# Altium PCB Dev_Board.PcbDoc
Units mil, origin at the board's own origin, x right, y up, seen from the top; angles counter-clockwise.
Board outline 2748.38 x 2397.24 mil, 2 copper layers (Top Layer, Bottom Layer); 80 components, 110 nets, 302 pads, 128 vias.
Unrouted connection lines stored in the file: 20.
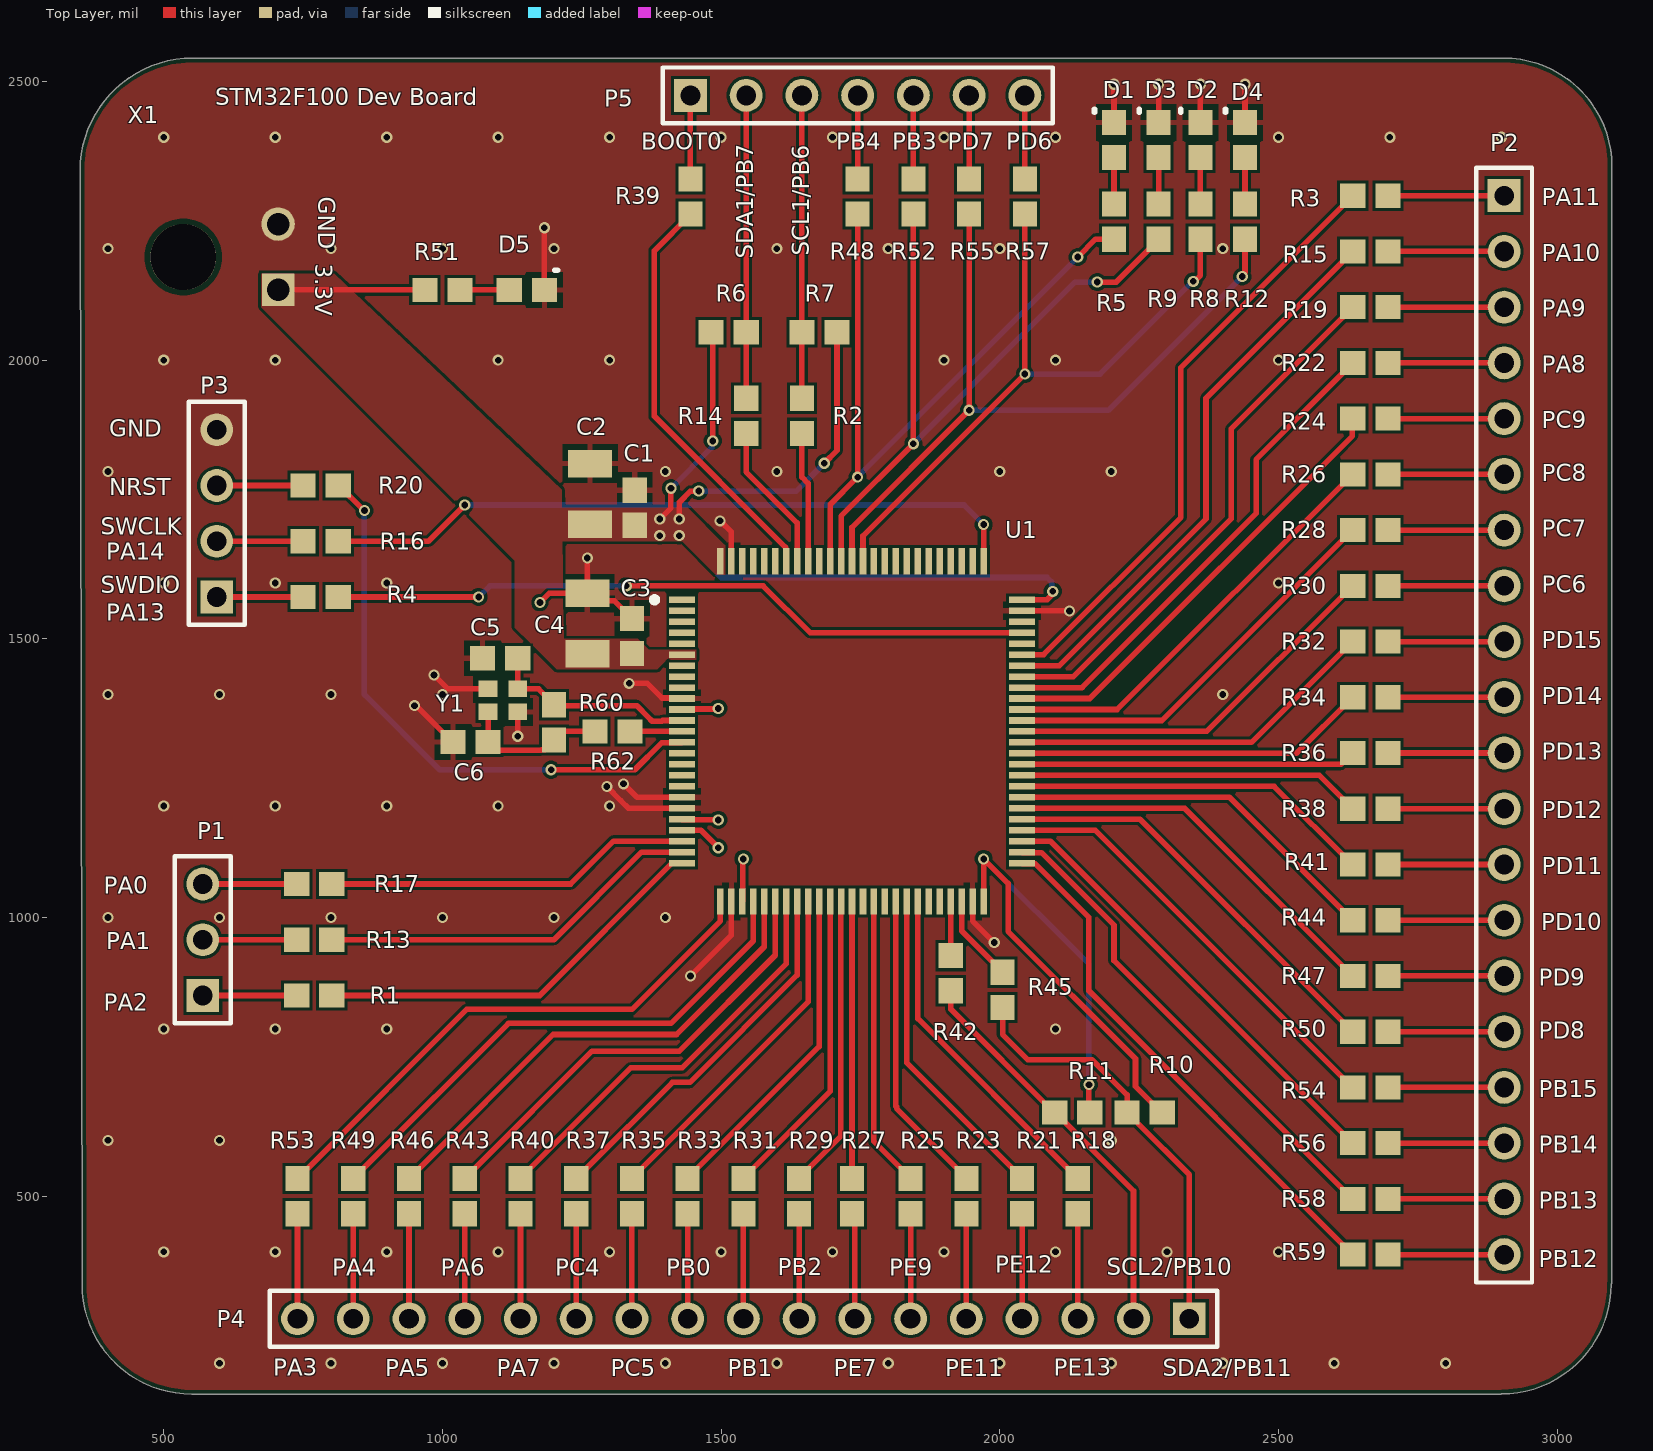
[diagram p0: Top Layer view]
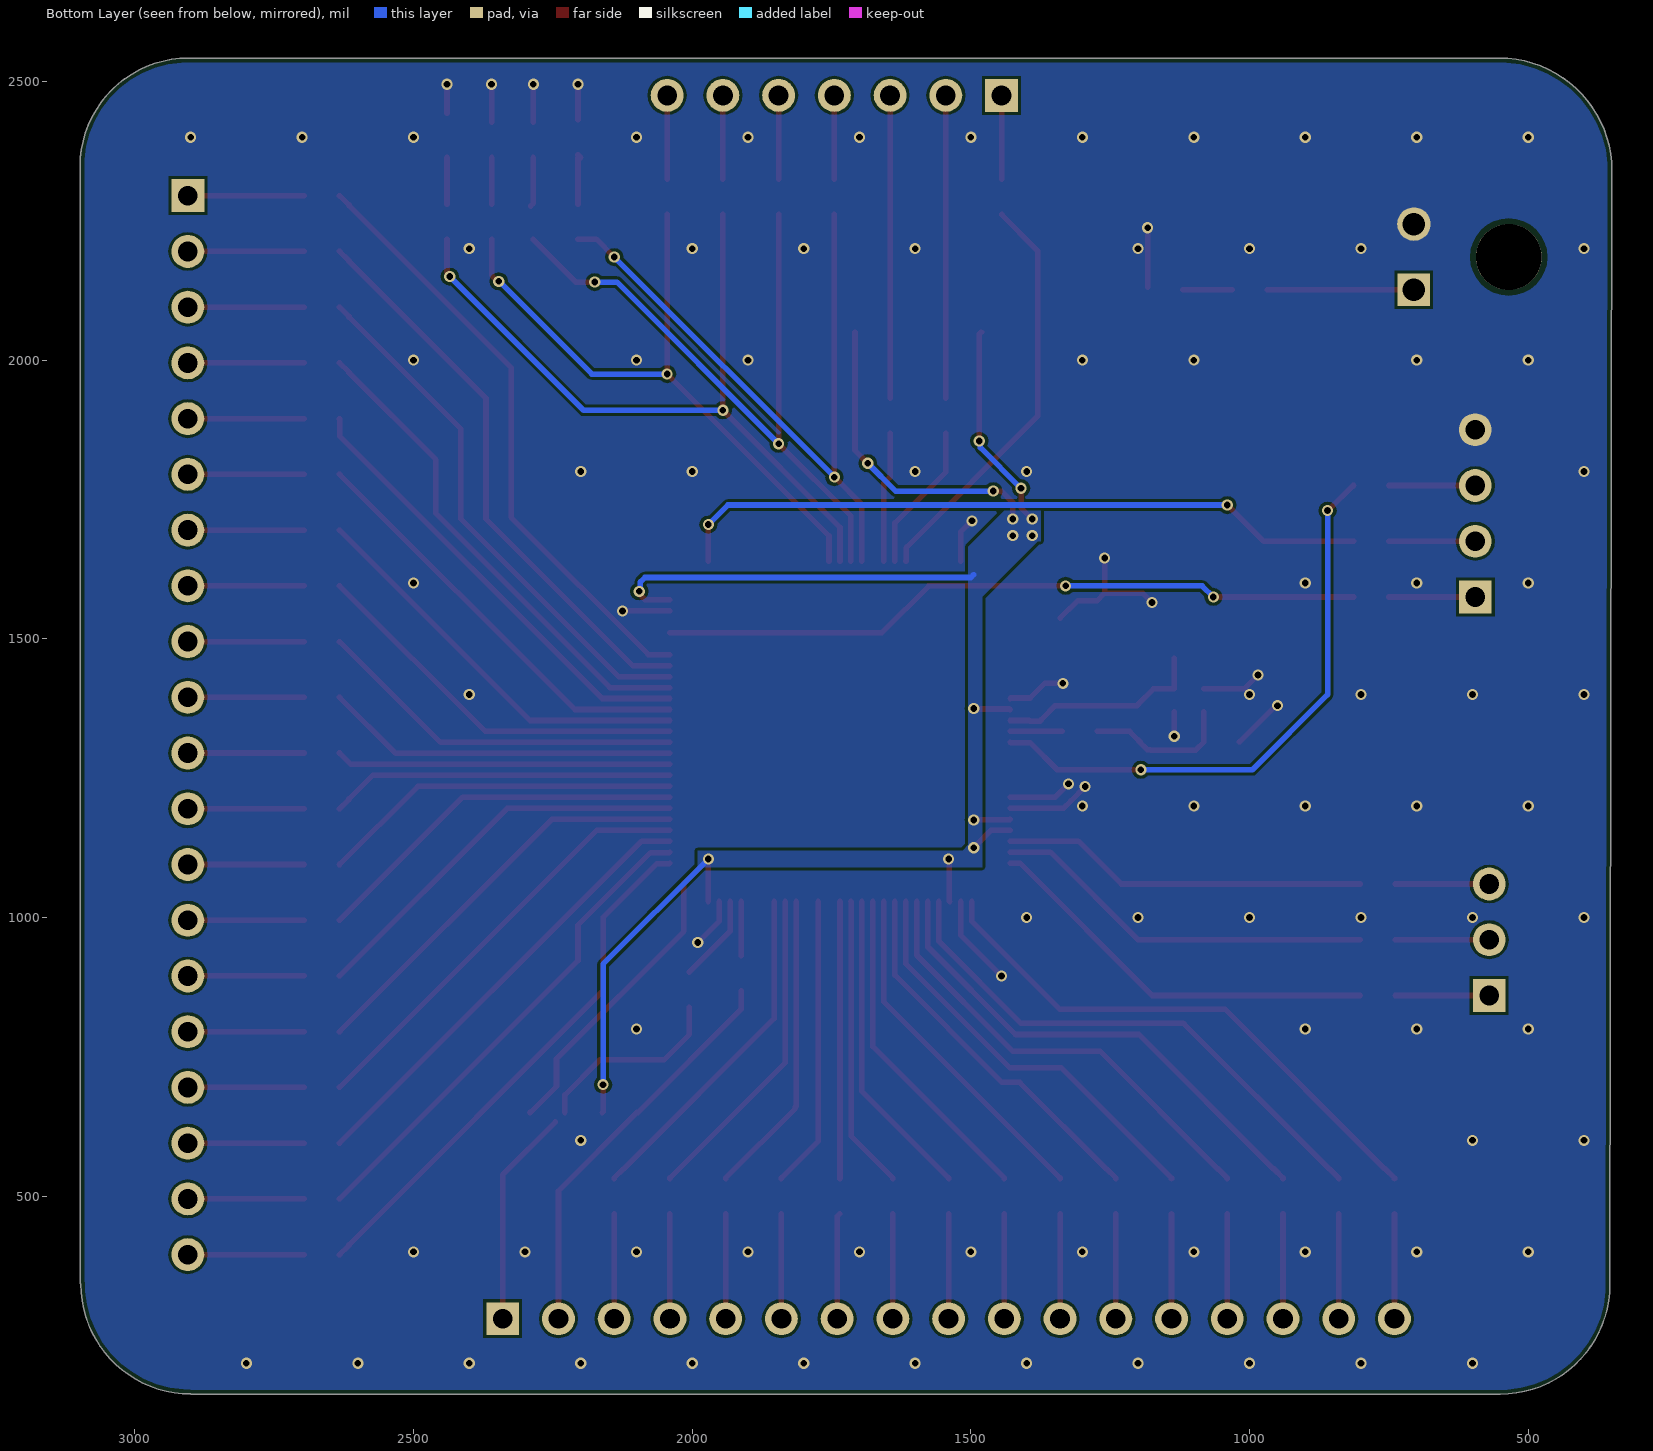
[diagram p1: Bottom Layer view, seen from below]
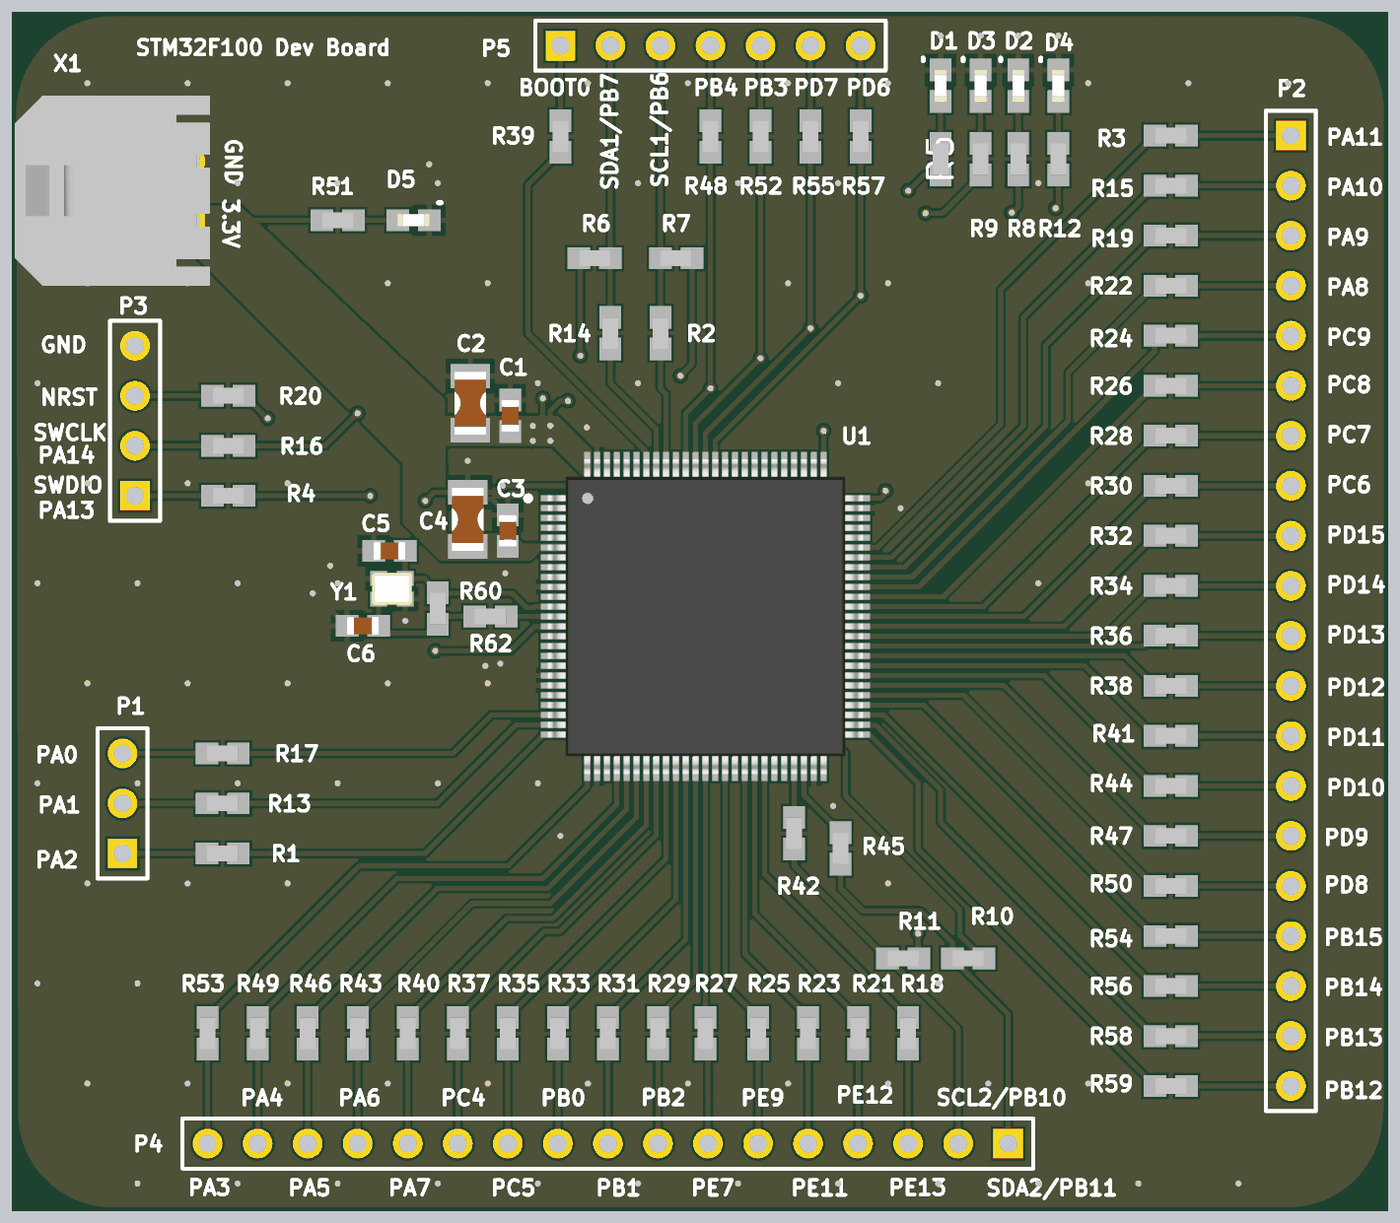
[diagram p2: 3D render of the assembled board from above, using the file's embedded part models]

## Layer stack, top to bottom
Top Solder: solder mask 0.4, Solder Resist, Dk 3.5
Top Layer: signal copper 1.4
Dielectric 1: dielectric 12.6, FR-4, Dk 4.8
Bottom Layer: signal copper 1.4
Bottom Solder: solder mask 0.4, Solder Resist, Dk 3.5

## Board outline
353.47,341.46 349.9,2339.9 cw(c551.85,2339.9) 551.85,2541.85 550,2541.85 2903.84,2541.85 cw(c2903.84,2347.41) 3098.28,2347.41 3098.28,343.28 3096.85,341.85 cw(c2900,341.85) 2900,145 2900,144.61 550.32,144.61 cw(c550.32,341.46)

## Design rules (kind name [scope] priority, off if disabled: settings)
BoardOutlineClearance [All] p1: gap=7.87 ignorepadtopadclearanceinfootprint=FALSE
Clearance [All] p1: gap=5 ignorepadtopadclearanceinfootprint=FALSE except(9.84: Arc-Hole Track-Hole SMDPad-Hole THPad-Hole Via-Hole Fill-Hole Poly-Hole Region-Hole Text-Hole)
ComponentClearance [All] p1: gap=5 collisioncheckmode=3 verticalgap=5 showdistances=TRUE
DiffPairsRouting [All] p1: maxlimit=10 minlimit=5 mostfreqgap=5 toplayer_minwidth=5 toplayer_maxwidth=1000 toplayer_prefwidth=5 bottomlayer_minwidth=5 bottomlayer_maxwidth=1000 bottomlayer_prefwidth=5 maxuncoupledlength=500
Height [All] p1: minheight=0 maxheight=71497.94 prefheight=500
HoleSize [All] p1: absolutevalues=TRUE maxlimit=248.03 minlimit=11.81 maxpercent=80.000 minpercent=20.000
HoleToHoleClearance [All] p1: gap=9.84 allowstackedmicrovias=FALSE
MinimumAnnularRing [All] p1: minimumring=3
MinimumSolderMaskSliver [All] p1: minsoldermaskwidth=0
PlaneClearance [All] p1: clearance=5
PlaneConnect PlaneConnect_1 [All] p1: planeconnectstyle=Direct reliefexpansion=20 reliefentries=4 reliefconductorwidth=10 reliefairgap=10
PolygonConnect PolygonConnect_12 [All vs IsNamedPolygon('GND_L02_P008')] p1: thpad.connectstyle=Direct thpad.reliefconductorwidth=10 thpad.reliefentries=4 thpad.polygonreliefangle="90 Angle" thpad.airgapwidth=10 smdpad.connectstyle=Relief smdpad.reliefconductorwidth=10 smdpad.reliefentries=4 smdpad.polygonreliefangle="90 Angle" smdpad.airgapwidth=10 via.connectstyle=Direct via.reliefconductorwidth=10 via.reliefentries=4 via.polygonreliefangle="90 Angle" via.airgapwidth=10
PolygonConnect PolygonConnect_11 [All vs IsNamedPolygon('GND_L01_P006')] p2: thpad.connectstyle=Direct thpad.reliefconductorwidth=10 thpad.reliefentries=4 thpad.polygonreliefangle="90 Angle" thpad.airgapwidth=10 smdpad.connectstyle=Relief smdpad.reliefconductorwidth=10 smdpad.reliefentries=4 smdpad.polygonreliefangle="90 Angle" smdpad.airgapwidth=10 via.connectstyle=Direct via.reliefconductorwidth=10 via.reliefentries=4 via.polygonreliefangle="90 Angle" via.airgapwidth=10
PolygonConnect PolygonConnect_10 [All vs IsNamedPolygon('GND_L02_P008')] p3: connectstyle=Relief reliefconductorwidth=10 reliefentries=4 polygonreliefangle="90 Angle" airgapwidth=10
PolygonConnect PolygonConnect_9 [All vs IsNamedPolygon('GND_L01_P006')] p4: connectstyle=Relief reliefconductorwidth=10 reliefentries=4 polygonreliefangle="90 Angle" airgapwidth=10
PolygonConnect PolygonConnect_8 [All vs IsNamedPolygon('GND_L02_P001')] p5: connectstyle=Relief reliefconductorwidth=10 reliefentries=4 polygonreliefangle="90 Angle" airgapwidth=10
PolygonConnect PolygonConnect_7 [All vs IsNamedPolygon('GND_L01_P000')] p6: connectstyle=Relief reliefconductorwidth=10 reliefentries=4 polygonreliefangle="90 Angle" airgapwidth=10
PolygonConnect PolygonConnect_6 [All vs IsNamedPolygon('NONET_L01_P001')] p7: connectstyle=Relief reliefconductorwidth=10 reliefentries=4 polygonreliefangle="90 Angle" airgapwidth=10
PolygonConnect GND_Connect [All vs IsNamedPolygon('GND_L01_P000')] p8: connectstyle=Relief reliefconductorwidth=10 reliefentries=4 polygonreliefangle="90 Angle" airgapwidth=10
PolygonConnect PolygonConnect_5 [All vs IsNamedPolygon('NONET_L02_P005')] p9: thpad.connectstyle=Direct thpad.reliefconductorwidth=10 thpad.reliefentries=4 thpad.polygonreliefangle="90 Angle" thpad.airgapwidth=10 smdpad.connectstyle=Direct smdpad.reliefconductorwidth=10 smdpad.reliefentries=4 smdpad.polygonreliefangle="90 Angle" smdpad.airgapwidth=10 via.connectstyle=Relief via.reliefconductorwidth=10 via.reliefentries=4 via.polygonreliefangle="90 Angle" via.airgapwidth=10
PolygonConnect PolygonConnect_4 [All vs IsNamedPolygon('NONET_L01_P004')] p10: thpad.connectstyle=Direct thpad.reliefconductorwidth=10 thpad.reliefentries=4 thpad.polygonreliefangle="90 Angle" thpad.airgapwidth=10 smdpad.connectstyle=Direct smdpad.reliefconductorwidth=10 smdpad.reliefentries=4 smdpad.polygonreliefangle="90 Angle" smdpad.airgapwidth=10 via.connectstyle=Relief via.reliefconductorwidth=10 via.reliefentries=4 via.polygonreliefangle="90 Angle" via.airgapwidth=10
PolygonConnect PolygonConnect_3 [All vs IsNamedPolygon('NONET_L01_P004')] p11: thpad.connectstyle=Direct thpad.reliefconductorwidth=10 thpad.reliefentries=4 thpad.polygonreliefangle="90 Angle" thpad.airgapwidth=10 smdpad.connectstyle=Direct smdpad.reliefconductorwidth=10 smdpad.reliefentries=4 smdpad.polygonreliefangle="90 Angle" smdpad.airgapwidth=10 via.connectstyle=Relief via.reliefconductorwidth=10 via.reliefentries=4 via.polygonreliefangle="90 Angle" via.airgapwidth=10
PolygonConnect PolygonConnect_2 [All vs IsNamedPolygon('3.3V_L01_P005')] p12: thpad.connectstyle=Direct thpad.reliefconductorwidth=10 thpad.reliefentries=4 thpad.polygonreliefangle="90 Angle" thpad.airgapwidth=10 smdpad.connectstyle=Direct smdpad.reliefconductorwidth=10 smdpad.reliefentries=4 smdpad.polygonreliefangle="90 Angle" smdpad.airgapwidth=10 via.connectstyle=Relief via.reliefconductorwidth=10 via.reliefentries=4 via.polygonreliefangle="90 Angle" via.airgapwidth=10
PolygonConnect PolygonConnect_1 [All] p13: connectstyle=Direct reliefconductorwidth=10 reliefentries=4 polygonreliefangle="90 Angle" airgapwidth=10
PolygonConnect PolygonConnectPowerPads [All vs (InPadClass('PowerPads'))] p14 off: connectstyle=Direct reliefconductorwidth=10 reliefentries=4 polygonreliefangle="90 Angle" airgapwidth=10
PolygonConnect [All] p15 off: thpad.connectstyle=Relief thpad.reliefconductorwidth=5 thpad.reliefentries=4 thpad.polygonreliefangle="90 Angle" thpad.airgapwidth=5 smdpad.connectstyle=Relief smdpad.reliefconductorwidth=5 smdpad.reliefentries=4 smdpad.polygonreliefangle="90 Angle" smdpad.airgapwidth=5 via.connectstyle=Direct via.reliefconductorwidth=5 via.reliefentries=4 via.polygonreliefangle="90 Angle" via.airgapwidth=5
RoutingVias [All] p1: holewidth=11.81 width=23.62 viastyle="Through Hole" minholewidth=11.81 minwidth=23.62 maxholewidth=23.62 maxwidth=259.84
SilkToSilkClearance [All] p1: silktosilkclearance=0
SilkToSolderMaskClearance [IsPad] p1: minsilkscreentomaskgap=5 clearancetoexposedcopper=TRUE
SolderMaskExpansion [ISvIA] p1: expansion=2.95 istentingtop=TRUE
Width [All] p1: maxlimit=1000 minlimit=5 preferedwidth=5 minimp=50.000000 maximp=50.000000 favimp=50.000000
20 further rules are at their usual default settings.

## Components (designator, comment, footprint, x,y, rotation, side; value= is the part's Value field where it differs from the comment)
C1 "C1608C0G2A103J080AC" CAP-0603 1345,1735 r90 top
C2 "CAP-1U-0001" "CAP-1206 - duplicate" 1265,1755 r90 top
C3 "C1608C0G2A103J080AC" CAP-0603 1340,1505 r90 top
C4 "CAP-1U-0001" "CAP-1206 - duplicate" 1260,1522.64 r90 top
C5 "CC0603DRNPO9BN8R0" CAP-0603 1103.5,1465 r180 top
C6 "CC0603DRNPO9BN8R0" CAP-0603 1050.35,1315 r180 top
D1 "150060AS75000" LED-0603 2205,2395 r90 top
D2 "150060AS75000" LED-0603 2360,2395 r90 top
D3 "150060AS75000" LED-0603 2285,2395 r90 top
D4 "150060AS75000" LED-0603 2440,2395 r90 top
D5 "150060AS75000" LED-0603 1151.5,2125.94 r0 top
P1 "Left Header" HDR1X3 570,860 r90 top
P2 "Right Header" HDR1X20 2905,2295 r270 top
P3 "Debug Header" HDR1X4 595,1575 r90 top
P4 "Header 17" HDR1X17 2340,280 r180 top
P5 "Top Header" HDR1X7 1445,2475 r0 top
R1 "RMCF0603ZT0R00" RES-0603 770,860 r180 top
R2 "RMCF0603ZT0R00" RES-0603 1645,1900 r90 top
R3 "RMCF0603ZT0R00" RES-0603 2665,2295 r0 top
R4 "RMCF0603ZT0R00" RES-0603 781.5,1575 r180 top
R5 "AC0603FR-10100RL" RES-0603 2205,2248.5 r90 top
R6 "AF0603FR-074K7L" RES-0603 1513.5,2050 r180 top
R7 "AF0603FR-074K7L" RES-0603 1676.5,2050 r0 top
R8 "AC0603FR-10100RL" RES-0603 2360,2248.5 r90 top
R9 "AC0603FR-10100RL" RES-0603 2285,2248.5 r90 top
R10 "AF0603FR-074K7L" RES-0603 2260,650 r0 top
R11 "AF0603FR-074K7L" RES-0603 2130,650 r0 top
R12 "AC0603FR-10100RL" RES-0603 2440,2248.5 r90 top
R13 "RMCF0603ZT0R00" RES-0603 770,960 r180 top
R14 "RMCF0603ZT0R00" RES-0603 1545,1900 r90 top
R15 "RMCF0603ZT0R00" RES-0603 2665,2195 r0 top
R16 "RMCF0603ZT0R00" RES-0603 781.5,1675 r180 top
R17 "RMCF0603ZT0R00" RES-0603 770,1060 r180 top
R18 "RMCF0603ZT0R00" RES-0603 2140,500 r270 top
R19 "RMCF0603ZT0R00" RES-0603 2665,2095 r0 top
R20 "RMCF0603ZT0R00" RES-0603 781.5,1775 r180 top
R21 "RMCF0603ZT0R00" RES-0603 2040,500 r270 top
R22 "RMCF0603ZT0R00" RES-0603 2665,1995 r0 top
R23 "RMCF0603ZT0R00" RES-0603 1940,500 r270 top
R24 "RMCF0603ZT0R00" RES-0603 2665,1895 r0 top
R25 "RMCF0603ZT0R00" RES-0603 1840,500 r270 top
R26 "RMCF0603ZT0R00" RES-0603 2665,1795 r0 top
R27 "RMCF0603ZT0R00" RES-0603 1735,500 r270 top
R28 "RMCF0603ZT0R00" RES-0603 2665,1695 r0 top
R29 "RMCF0603ZT0R00" RES-0603 1640,500 r270 top
R30 "RMCF0603ZT0R00" RES-0603 2665,1595 r0 top
R31 "RMCF0603ZT0R00" RES-0603 1540,500 r270 top
R32 "RMCF0603ZT0R00" RES-0603 2665,1495 r0 top
R33 "RMCF0603ZT0R00" RES-0603 1440,500 r270 top
R34 "RMCF0603ZT0R00" RES-0603 2665,1395 r0 top
R35 "RMCF0603ZT0R00" RES-0603 1340,500 r270 top
R36 "RMCF0603ZT0R00" RES-0603 2665,1295 r0 top
R37 "RMCF0603ZT0R00" RES-0603 1240,500 r270 top
R38 "RMCF0603ZT0R00" RES-0603 2665,1195 r0 top
R39 "RMCF0603ZT0R00" RES-0603 1445,2293.5 r90 top
R40 "RMCF0603ZT0R00" RES-0603 1140,500 r270 top
R41 "RMCF0603ZT0R00" RES-0603 2665,1095 r0 top
R42 "RMCF0603ZT0R00" RES-0603 1912.05,900 r90 top
R43 "RMCF0603ZT0R00" RES-0603 1040,500 r270 top
R44 "RMCF0603ZT0R00" RES-0603 2665,995 r0 top
R45 "RMCF0603ZT0R00" RES-0603 2005,870 r90 top
R46 "RMCF0603ZT0R00" RES-0603 940,500 r270 top
R47 "RMCF0603ZT0R00" RES-0603 2665,895 r0 top
R48 "RMCF0603ZT0R00" RES-0603 1745,2293.5 r90 top
R49 "RMCF0603ZT0R00" RES-0603 840,500 r270 top
R50 "RMCF0603ZT0R00" RES-0603 2665,795 r0 top
R51 "AC0603FR-10100RL" RES-0603 1000,2125.94 r0 top
R52 "RMCF0603ZT0R00" RES-0603 1845,2293.5 r90 top
R53 "RMCF0603ZT0R00" RES-0603 740,500 r270 top
R54 "RMCF0603ZT0R00" RES-0603 2665,695 r0 top
R55 "RMCF0603ZT0R00" RES-0603 1945,2293.5 r90 top
R56 "RMCF0603ZT0R00" RES-0603 2665,595 r0 top
R57 "RMCF0603ZT0R00" RES-0603 2045,2293.5 r90 top
R58 "RMCF0603ZT0R00" RES-0603 2665,495 r0 top
R59 "RMCF0603ZT0R00" RES-0603 2665,395 r0 top
R60 "RMCF0603FT1M00" RES-0603 1200,1350 r270 top
R62 "RMCF0603ZT0R00" RES-0603 1305,1333.74 r180 top
U1 "STM32F100VBT7B" IC-STM32F100-0001 1734.88,1333.74 r270 top
X1 "Molex - Micro-Fit 3.0 Series connector,  3.00mm (0.118\") pitch header, 2 positions." 43650-0200 535,2185 r270 top
Y1 "ECS-240-6-37B-7KM-TR" CRYSTAL-4-SMD-0001 1135,1410 r180 top

## Footprints (in the part's own frame and the unit in brackets; to place one, negate y for a bottom-side part, rotate by r counter-clockwise, add the part's x,y. Pads: shape width x height; smd on the part's side, far side on the other; paste and mask are expansions set on the pad)
43650-0200 [mm]
  round 3 hole 3 unplated: 1(0,0)
  rect 1.482x1.482 / inner rect 1.524x1.524 / far side rect 1.482x1.482 hole 1.02: P$1(1.5,4.32)
  round 1.53 / inner round 1.524 / far side round 1.53 hole 1.02: P$2(-1.5,4.32)
  body extent -4.82,-4.57 4.83,5.33, height 5.68
CAP-0603 [mm]
  rect 1.15x1.1 smd: 1(-0.8,0) 2(0.8,0)
  body extent -0.8,-0.45 0.8,0.45, height 0.8
"CAP-1206 - duplicate" [mm]
  rect 1.25x2 smd: 1(-1.248,0) 2(1.502,0)
  body extent -1.47,-0.8 1.73,0.8, height 1.5
CRYSTAL-4-SMD-0001 [mm]
  rect 0.85x0.75 smd: 1(0,0) 2(0,1.05) 2(1.35,0) 3(1.35,1.05)
  body extent -0.33,-0.28 1.68,1.33, height 0.5
HDR1X3 [mm] "Connector; Header; 3 Position"
  rect 1.5x1.5 hole 0.9: 1(0,0)
  round 1.5 hole 0.9: 2(2.54,0) 3(5.08,0)
  silkscreen extent -1.27,-1.27 6.35,1.27
HDR1X4 [mm] "Connector; Header; 4 Position"
  rect 1.5x1.5 hole 0.9: 1(0,0)
  round 1.5 hole 0.9: 2(2.54,0) 3(5.08,0) 4(7.62,0)
  silkscreen extent -1.27,-1.27 8.89,1.27
HDR1X7 [mm] "Connector; Header; 7 Position"
  rect 1.5x1.5 hole 0.9: 1(0,0)
  round 1.5 hole 0.9: 2(2.54,0) 3(5.08,0) 4(7.62,0) 5(10.16,0) 6(12.7,0) 7(15.24,0)
  silkscreen extent -1.27,-1.27 16.51,1.27
HDR1X17 [mm] "Connector; Header; 17 Position"
  rect 1.5x1.5 hole 0.9: 1(0,0)
  round 1.5 hole 0.9: 2(2.54,0) 3(5.08,0) 4(7.62,0) 5(10.16,0) 6(12.7,0) 7(15.24,0) 8(17.78,0) 9(20.32,0) 10(22.86,0) 11(25.4,0) 12(27.94,0) 13(30.48,0) 14(33.02,0) 15(35.56,0) 16(38.1,0) 17(40.64,0)
  silkscreen extent -1.27,-1.27 41.91,1.27
HDR1X20 [mm] "Connector; Header; 20 Position"
  rect 1.5x1.5 hole 0.9: 1(0,0)
  round 1.5 hole 0.9: 2(2.54,0) 3(5.08,0) 4(7.62,0) 5(10.16,0) 6(12.7,0) 7(15.24,0) 8(17.78,0) 9(20.32,0) 10(22.86,0) 11(25.4,0) 12(27.94,0) 13(30.48,0) 14(33.02,0) 15(35.56,0) 16(38.1,0) 17(40.64,0) 18(43.18,0) 19(45.72,0) 20(48.26,0)
  silkscreen extent -1.27,-1.27 49.53,1.27
IC-STM32F100-0001 [mm] "STM32F100VBT7b"
  rect 0.3x1.2 smd: 1(-6,-7.75) 2(-5.5,-7.75) 3(-5,-7.75) 4(-4.5,-7.75) 5(-4,-7.75) 6(-3.5,-7.75) 7(-3,-7.75) 8(-2.5,-7.75) 9(-2,-7.75) 10(-1.5,-7.75) 11(-1,-7.75) 12(-0.5,-7.75) 13(0,-7.75) 14(0.5,-7.75) 15(1,-7.75) 16(1.5,-7.75) 17(2,-7.75) 18(2.5,-7.75) 19(3,-7.75) 20(3.5,-7.75) 21(4,-7.75) 22(4.5,-7.75) 23(5,-7.75) 24(5.5,-7.75) 25(6,-7.75) 51(6,7.75) 52(5.5,7.75) 53(5,7.75) 54(4.5,7.75) 55(4,7.75) 56(3.5,7.75) 57(3,7.75) 58(2.5,7.75) 59(2,7.75) 60(1.5,7.75) 61(1,7.75) 62(0.5,7.75) 63(0,7.75) 64(-0.5,7.75) 65(-1,7.75) 66(-1.5,7.75) 67(-2,7.75) 68(-2.5,7.75) 69(-3,7.75) 70(-3.5,7.75) 71(-4,7.75) 72(-4.5,7.75) 73(-5,7.75) 74(-5.5,7.75) 75(-6,7.75)
  rect 1.2x0.3 smd: 26(7.75,-6) 27(7.75,-5.5) 28(7.75,-5) 29(7.75,-4.5) 30(7.75,-4) 31(7.75,-3.5) 32(7.75,-3) 33(7.75,-2.5) 34(7.75,-2) 35(7.75,-1.5) 36(7.75,-1) 37(7.75,-0.5) 38(7.75,0) 39(7.75,0.5) 40(7.75,1) 41(7.75,1.5) 42(7.75,2) 43(7.75,2.5) 44(7.75,3) 45(7.75,3.5) 46(7.75,4) 47(7.75,4.5) 48(7.75,5) 49(7.75,5.5) 50(7.75,6) 76(-7.75,6) 77(-7.75,5.5) 78(-7.75,5) 79(-7.75,4.5) 80(-7.75,4) 81(-7.75,3.5) 82(-7.75,3) 83(-7.75,2.5) 84(-7.75,2) 85(-7.75,1.5) 86(-7.75,1) 87(-7.75,0.5) 88(-7.75,0) 89(-7.75,-0.5) 90(-7.75,-1) 91(-7.75,-1.5) 92(-7.75,-2) 93(-7.75,-2.5) 94(-7.75,-3) 95(-7.75,-3.5) 96(-7.75,-4) 97(-7.75,-4.5) 98(-7.75,-5) 99(-7.75,-5.5) 100(-7.75,-6)
  silkscreen extent -6.13,-9.13 -5.87,-8.87, body extent -8,-8 8,8, height 1.6
LED-0603 [mm]
  rect 1.15x1.1 smd: 1(-0.8,0) 2(0.8,0)
  silkscreen extent 1.27,0.89 1.4,0.89, body extent -0.8,-0.3 0.8,0.3, height 1
RES-0603 [mm]
  rect 1.15x1.1 smd: 1(-0.8,0) 2(0.8,0)
  body extent -0.8,-0.4 0.8,0.4, height 0.43

## Part data
C1 C3: library part CAP-10N-0002, "CAP CER 10000PF 100V C0G 0603", Capacitance="10nF +/-5%", Manufacturer="TDK Corporation", Package Size=0603, Temperature Coefficient=C0G/NP0, Voltage Rating=100V, Assembled?=no, Manufacturer Part Number=C1608C0G2A103J080AC
C2 C4: "1 µF ±10% 100V Ceramic Capacitor X7R 1206 (3216 Metric)", Capacitance="1 uF +/- 10%", Voltage=100V
C5 C6: library part CAP-8P-0001, "8 pF ±0.5pF 50V Ceramic Capacitor C0G, NP0 0603 (1608 Metric)", Capacitance="8 pF +/- 0.5 pF", Package Size=0603, Voltage=50V
D1 D2 D3 D4 D5: library part LED_Amber_0001, "CAP CER 0.1UF 100V X7R 0603", Color=Amber, Current Rating=20mA, Manufacturer="Wurth Electronik", Package Size=0603, Assembled?=no, Manufacturer Part Number=150060AS75000, Vf=2V
P1: library part "Header 3", "Header, 3-Pin", LatestRevisionDate=17-Jul-2002, LatestRevisionNote="Re-released for DXP Platform.", Publisher="Altium Limited"
P2: library part "Header 20", "Header, 20-Pin", LatestRevisionDate=17-Jul-2002, LatestRevisionNote="Re-released for DXP Platform.", Publisher="Altium Limited"
P3: library part "Header 4", "Header, 4-Pin", LatestRevisionDate=17-Jul-2002, LatestRevisionNote="Re-released for DXP Platform.", Publisher="Altium Limited"
P4: "Header, 17-Pin", LatestRevisionDate=17-Jul-2002, LatestRevisionNote="Re-released for DXP Platform.", Publisher="Altium Limited"
P5: library part "Header 7", "Header, 7-Pin", LatestRevisionDate=17-Jul-2002, LatestRevisionNote="Re-released for DXP Platform.", Publisher="Altium Limited"
R1 R2 R3 R4 R13 R14 R15 R16 R17 R18 R19 R20 R21 R22 R23 R24 R25 R26 R27 R28 R29 R30 R31 R32 R33 R34 R35 R36 R37 R38 R39 R40 R41 R42 R43 R44 R45 R46 R47 R48 R49 R50 R52 R53 R54 R55 R56 R57 R58 R59 R62: library part RES-0-0001, "0 Ohms Jumper 0.1W, 1/10W Chip Resistor 0603 (1608 Metric) Automotive AEC-Q200 Thick Film", Package Size=0603, Power="1/10 W", Resistance="0 Ohm"
R5 R8 R9 R12 R51: library part RES-100-0002, "RESISTOR SMD", Manufacturer=YAGEO, Package Size=0603, Power Rating=1/10W, Resistance="100Ohm +/-1%", Assembled?=no, Manufacturer Part Number=AC0603FR-10100RL
R6 R7 R10 R11: library part RES-4.7K-0002, "RES SMD 4.7K OHM 1% 1/10W 0603", Manufacturer=YAGEO, Package Size=0603, Power Rating=1/10W, Resistance="4.7kOhm +/-1%", Assembled?=no, Manufacturer Part Number=AF0603FR-074K7L
R60: library part RES-1M-0001, "1 MOhms ±1% 0.1W, 1/10W Chip Resistor 0603 (1608 Metric) Automotive AEC-Q200 Thick Film", Package Size=0603, Power="1/10 W", Resistance="1 MOhm"
U1: library part IC-STM32F100-0001, "ARM® Cortex®-M3 STM32F1 Microcontroller IC 32-Bit Single-Core 24MHz 128KB (128K x 8) FLASH 100-LQFP (14x14)", Package Size=100-LQFP, Manufacturer Part Number=STM32F100VBT7B, VCC="2 ~ 3.6V"
X1: library part HEADER_POS2_?43650-0200
Y1: library part CRYSTAL-24MHz-0001, "24 MHz ±7ppm Crystal 6pF 50 Ohms 4-SMD, No Lead", Equavalence Series Resistance="50 Ohm", Frequency="24 MHZ", Frequency Tolerance="+/- 7 ppm", Load Capacitance="6 pF", Manufacturer="ECS Inc.", Package Size=4-SMD, Manufacturer Part Number=ECS-240-6-37B-7KM-TR

## Via types
v1: diameter 20, hole 12, Top Layer to Bottom Layer, tented both sides, 128 vias

## Nets (pads, with @x,y where several pads share a name; then routed paths per layer and width w, separated by ;. In a path a pad name is that pad's centre, name@x,y a point inside that pad or via, vN(x,y) a via of type N, cw(c..) or ccw(c..) an arc to the next point about the centre after c; other vN are vias at no path point)
3.3V: C1.1 C2.1 C3.1 C4.1 R6.2 R7.2 R10.2 R11.2 R51.1 U1.6 U1.11 U1.21 U1.22 U1.28 U1.50 U1.75 U1.100 X1.P$1 | length 3369.3
  Top Layer w10: X1.P$1 R51.1 ; v1(1390,1715) 1410,1735 v1(1410,1770) ; v1@1425,1715.36 1425,1745 1444.82,1764.82 1459.82,1764.82 v1(1460,1765) ; U1.22 1463.43,1156.57 v1(1495,1125) ; U1.21 1430.39,1175.63 1494.37,1175.63 v1(1495,1175) ; U1.11 1430.67,1374.02 1494.02,1374.02 v1(1495,1375) ; R6.2@1481.02,2050 R6.2 1485,2047.01 v1(1485,1855) ; U1.28 1538.94,1029.53 1538.94,1103.94 v1(1540,1105) ; v1(1685,1815) 1707.99,1837.99 R7.2 ; U1.50 v1(1971.1,1105) 2015,1061.1 2015,975 2243.5,746.5 2243.5,697.01 2290.51,650 R10.2 ; U1.75 2084.96,1569.96 v1@2095,1580 ; v1(2160,700) 2160,651.5 R11.2
  Bottom Layer w10: v1(1410,1770) 1483.09,1843.09 1483.09,1853.09 v1(1485,1855) ; v1(1460,1765) 1635,1765 v1(1685,1815) ; 1495,1615 1500,1610 2085,1610 2093.09,1601.91 2093.09,1586.91 v1(2095,1585) ; v1(1971.1,1105) 2160,916.1 v1(2160,700)
  other v1: 1390,1685 1425,1685 1425,1715
BOOT0: R39.1 U1.94 | length 748.1
  Top Layer w10: R39.1 1445,2261.02 1380,2196.02 1380,1899.61 1615.87,1663.75 1615.87,1639.76 U1.94
DEBUG_LED0: R5.1 R48.1 U1.90 | length 1280.5
  Top Layer w10: U1.90 1695.51,1740.51 v1(1745,1790) R48.1 ; v1(2140,2185) 2172.01,2217.01 R5.1
  Bottom Layer w10: v1(1745,1790) v1(2140,2185)
DEBUG_LED1: R9.1 R52.1 U1.89 | length 1269.5
  Top Layer w10: U1.89 1715.2,1720.2 v1(1845,1850) R52.1 ; v1(2175,2140) 2208.98,2140 2285,2216.02 R9.1
  Bottom Layer w10: v1(1845,1850) 2135,2140 v1(2175,2140)
DEBUG_LED2: R12.1 R55.1 U1.88 | length 1368.7
  Top Layer w10: U1.88 1734.88,1699.88 v1(1945,1910) R55.1 ; v1(2435,2150) 2435,2152.71 2440,2157.71 R12.1
  Bottom Layer w10: v1(1945,1910) 2195,1910 v1(2435,2150)
DEBUG_LED3: R8.1 R57.1 U1.87 | length 1194
  Top Layer w10: U1.87 1754.57,1684.57 v1(2045,1975) R57.1 ; v1(2347.14,2141.32) 2349.14,2141.32 2360,2152.18 R8.1
  Bottom Layer w10: v1(2045,1975) 2180,1975 v1@2345,2140
GND: C1.2 C2.2 C3.2 C4.2 C5.2 C6.2 D1.2 D2.2 D3.2 D4.2 D5.2 P3.4 U1.10 U1.19 U1.20 U1.27 U1.49 U1.74 U1.99 X1.P$2 Y1.2 | length 1648.7
  Top Layer w10: v1(950,1380) 952.71,1380 956.15,1376.56 956.32,1376.56 1017.87,1315 C6.2 ; v1(985,1435) 1010,1410 Y1.2@1081.85,1410 ; v1(1135,1325) Y1.2@1135,1368.66 ; v1(1175,1565) 1191.77,1581.77 C4.2 ; D5.2@1182.99,2130.94 v1@1182.99,2236.46 ; v1(1260,1645) C4.2 ; v1(1295,1235) 1295,1234.46 1320.51,1208.94 ; 1320.53,1208.94 1333.53,1195.94 U1.20 ; v1(1324.93,1239.66) 1325.34,1239.66 1349.37,1215.63 U1.19 ; v1(1335,1420) 1367.62,1420 1393.92,1393.7 1428.86,1393.7 U1.10 ; C3.2 1340,1537.48 1323.35,1554.13 1322.36,1554.13 1308.51,1567.98 1273.79,1567.98 C4.2 ; v1(1445,895) 1518.35,968.35 U1.27 ; v1@1500,1710 1518.35,1691.65 U1.99 ; U1.49 1951.42,993.58 v1(1990,955) ; U1.74 2040.14,1550.14 2124.86,1550.14 v1(2125,1550) ; D1.2@2205,2431.5 v1(2205,2495) ; D3.2 v1(2285,2495) ; D2.2 v1(2360,2495) ; D4.2@2440,2442.99 v1(2440,2495)
  other v1: 600,200 800,200 1000,200 1200,200 1400,200 1600,200 1800,200 2000,200 2200,200 2400,200 2600,200 2800,200 500,400 700,400 900,400 1100,400 1300,400 1500,400 1700,400 1900,400 2100,400 2300,400 2500,400 400,600 600,600 2200,600 500,800 700,800 900,800 2100,800 400,1000 600,1000 800,1000 1000,1000 1200,1000 1400,1000 500,1200 700,1200 900,1200 1100,1200 1300,1200 400,1400 600,1400 800,1400 1000,1400 2400,1400 500,1600 700,1600 900,1600 2500,1600 1497.88,1711.54 400,1800 1400,1800 1600,1800 2000,1800 2200,1800 500,2000 700,2000 1100,2000 1300,2000 1900,2000 2100,2000 2500,2000 400,2200 800,2200 1000,2200 1200,2200 1600,2200 1800,2200 2000,2200 2400,2200 1182.91,2237.52 500,2400 700,2400 900,2400 1100,2400 1300,2400 1500,2400 1700,2400 1900,2400 2100,2400 2500,2400 2700,2400 2900,2400
NetC6_1: C6.1 R60.2 R62.2 Y1.3 | length 271
  Top Layer w10: Y1.3 C6.1 1096.85,1300 1177.49,1300 1178.35,1300.87 1183.35,1300.87 1200,1317.52 R60.2 ; R60.2@1196.5,1315 1215.24,1333.74 R62.2
NetD1_1: D1.1 R5.2 | length 90.6
  Top Layer w10: D1.1@2200,2363.5 D1.1@2205,2368.5 ; R5.2 D1.1
NetD2_1: D2.1 R8.2 | length 83.5
  Top Layer w10: R8.2 D2.1
NetD3_1: D3.1 R9.2 | length 89.1
  Top Layer w10: D3.1 2285,2281.5 R9.2@2290,2276.5
NetD4_1: D4.1 R12.2 | length 83.5
  Top Layer w10: R12.2 D4.1
NetD5_1: D5.1 R51.2 | length 88.5
  Top Layer w10: R51.2 D5.1
NetP1_1: P1.1 R1.2 | length 168.5
  Top Layer w10: P1.1 R1.2
NetP1_2: P1.2 R13.2 | length 168.5
  Top Layer w10: P1.2 R13.2
NetP1_3: P1.3 R17.2 | length 168.5
  Top Layer w10: P1.3 R17.2
NetP2_1: P2.1 R3.2 | length 208.5
  Top Layer w10: R3.2 P2.1
NetP2_2: P2.2 R15.2 | length 208.5
  Top Layer w10: R15.2 P2.2
NetP2_3: P2.3 R19.2 | length 208.5
  Top Layer w10: R19.2 P2.3
NetP2_4: P2.4 R22.2 | length 208.5
  Top Layer w10: R22.2 P2.4
NetP2_5: P2.5 R24.2 | length 208.5
  Top Layer w10: R24.2 P2.5
NetP2_6: P2.6 R26.2 | length 208.5
  Top Layer w10: R26.2 P2.6
NetP2_7: P2.7 R28.2 | length 208.5
  Top Layer w10: R28.2 P2.7
NetP2_8: P2.8 R30.2 | length 208.5
  Top Layer w10: R30.2 P2.8
NetP2_9: P2.9 R32.2 | length 208.5
  Top Layer w10: R32.2 P2.9
NetP2_10: P2.10 R34.2 | length 208.5
  Top Layer w10: R34.2 P2.10
NetP2_11: P2.11 R36.2 | length 208.5
  Top Layer w10: R36.2 P2.11
NetP2_12: P2.12 R38.2 | length 208.5
  Top Layer w10: R38.2 P2.12
NetP2_13: P2.13 R41.2 | length 208.5
  Top Layer w10: R41.2 P2.13
NetP2_14: P2.14 R44.2 | length 208.5
  Top Layer w10: R44.2 P2.14
NetP2_15: P2.15 R47.2 | length 208.5
  Top Layer w10: R47.2 P2.15
NetP2_16: P2.16 R50.2 | length 208.5
  Top Layer w10: R50.2 P2.16
NetP2_17: P2.17 R54.2 | length 208.5
  Top Layer w10: R54.2 P2.17
NetP2_18: P2.18 R56.2 | length 208.5
  Top Layer w10: R56.2 P2.18
NetP2_19: P2.19 R58.2 | length 208.5
  Top Layer w10: R58.2 P2.19
NetP2_20: P2.20 R59.2 | length 208.5
  Top Layer w10: R59.2 P2.20
NetP3_1: P3.1 R4.2 | length 155
  Top Layer w10: P3.1 R4.2
NetP3_2: P3.2 R16.2 | length 155
  Top Layer w10: P3.2 R16.2
NetP3_3: P3.3 R20.2 | length 155
  Top Layer w10: P3.3 R20.2
NetP4_3: P4.3 R18.2 | length 188.5
  Top Layer w10: P4.3 R18.2
NetP4_4: P4.4 R21.2 | length 188.5
  Top Layer w10: P4.4 R21.2
NetP4_5: P4.5 R23.2 | length 188.5
  Top Layer w10: P4.5 R23.2
NetP4_6: P4.6 R25.2 | length 188.5
  Top Layer w10: P4.6 R25.2
NetP4_7: P4.7 R27.2 | length 190.6
  Top Layer w10: R27.2 1740,463.5 P4.7
NetP4_8: P4.8 R29.2 | length 188.5
  Top Layer w10: P4.8 R29.2
NetP4_9: P4.9 R31.2 | length 188.5
  Top Layer w10: P4.9 R31.2
NetP4_10: P4.10 R33.2 | length 188.5
  Top Layer w10: P4.10 R33.2
NetP4_11: P4.11 R35.2 | length 188.5
  Top Layer w10: P4.11 R35.2
NetP4_12: P4.12 R37.2 | length 188.5
  Top Layer w10: P4.12 R37.2
NetP4_13: P4.13 R40.2 | length 188.5
  Top Layer w10: P4.13 R40.2
NetP4_14: P4.14 R43.2 | length 188.5
  Top Layer w10: P4.14 R43.2
NetP4_15: P4.15 R46.2 | length 188.5
  Top Layer w10: P4.15 R46.2
NetP4_16: P4.16 R49.2 | length 188.5
  Top Layer w10: P4.16 R49.2
NetP4_17: P4.17 R53.2 | length 188.5
  Top Layer w10: P4.17 R53.2
NetP5_1: P5.1 R39.2 | length 150
  Top Layer w10: R39.2 P5.1
NetP5_4: P5.4 R48.2 | length 150
  Top Layer w10: R48.2 P5.4
NetP5_5: P5.5 R52.2 | length 150
  Top Layer w10: R52.2 P5.5
NetP5_6: P5.6 R55.2 | length 150
  Top Layer w10: R55.2 P5.6
NetP5_7: P5.7 R57.2 | length 150
  Top Layer w10: R57.2 P5.7
NetR2_1: R2.1 U1.92 | length 234.3
  Top Layer w10: R2.1 1645,1790 1656.14,1778.86 U1.92
NetR14_1: R14.1 U1.93 | length 267.5
  Top Layer w10: R14.1 1545,1799.45 1636.46,1707.99 U1.93
NetR42_2: R42.2 U1.47 | length 97.1
  Top Layer w10: R42.2 U1.47
NetR45_2: R45.2 U1.48 | length 157.5
  Top Layer w10: U1.48 1931.73,975.75 2005,902.48 R45.2
NRST: R20.1 U1.14 | length 1041.6
  Top Layer w10: R20.1 813.98,1775 858.98,1730 v1(860,1730) ; v1(1195,1265) 1345,1265 1393.15,1313.15 1428.86,1313.15 U1.14
  Bottom Layer w10: v1(860,1730) 860,1400 995,1265 v1(1195,1265)
OSC_IN: C5.1 R60.1 U1.12 Y1.1 | length 375
  Top Layer w10: C5.1 Y1.1 1172.48,1410 1200,1382.48 R60.1 1201.5,1380 1348.67,1380 1369.13,1359.54 1369.13,1359.41 1376.53,1352.02 1393.63,1352.02 1395.04,1353.43 U1.12
OSC_OUT: R62.1 U1.13 | length 93.3
  Top Layer w10: R62.1 U1.13
PA0: R17.1 U1.23 | length 660.1
  Top Layer w10: R17.1 1230,1060 1306.89,1136.89 U1.23
PA1: R13.1 U1.24 | length 693.4
  Top Layer w10: R13.1 1200,960 1357.2,1117.2 U1.24
PA2: R1.1 U1.25 | length 726.7
  Top Layer w10: R1.1 1174.53,860 1412.05,1097.52 U1.25
PA3: R53.1 U1.26 | length 985.6
  Top Layer w10: R53.1 740,532.48 756.65,549.13 757.64,549.13 1043.5,835 1340,835 1498.66,993.66 U1.26
PA4: R49.1 U1.29 | length 965.7
  Top Layer w10: R49.1 840,532.48 856.65,549.13 857.64,549.13 1118.5,810 1410,810 1557.72,957.72 U1.29
PA5: R46.1 U1.30 | length 891.5
  Top Layer w10: R46.1 940,532.48 956.65,549.13 957.64,549.13 1198.5,790 1420,790 1577.4,947.4 U1.30
PA6: R43.1 U1.31 | length 820.1
  Top Layer w10: R43.1 1040,532.48 1056.65,549.13 1057.64,549.13 1268.5,760 1425,760 1597.09,932.09 U1.31
PA7: R40.1 U1.32 | length 748.8
  Top Layer w10: R40.1 1140,532.48 1337.52,730 1430,730 1616.77,916.77 U1.32
PA8: R22.1 U1.67 | length 891.9
  Top Layer w10: U1.67 2147.48,1412.48 2460,1725 2460,1821.5 2615.87,1977.36 2615.87,1978.35 2632.52,1995 R22.1
PA9: R19.1 U1.68 | length 963.2
  Top Layer w10: U1.68 2132.17,1432.17 2415,1715 2415,1876.5 2615.87,2077.36 2615.87,2078.35 2632.52,2095 R19.1
PA10: R15.1 U1.69 | length 1028.7
  Top Layer w10: U1.69 2106.85,1451.85 2370,1715 2370,1931.5 2615.87,2177.36 2615.87,2178.35 2632.52,2195 R15.1
PA11: R3.1 U1.70 | length 1092.5
  Top Layer w10: U1.70 2078.62,1471.54 2325,1717.91 2325,1986.5 2615.87,2277.36 2615.87,2278.35 2632.52,2295 R3.1
PA13: R4.1 U1.72 | length 1270.1
  Top Layer w10: R4.1 v1(1065,1575) ; v1(1330,1595) 1575.52,1595 1659.62,1510.91 U1.72
  Bottom Layer w10: v1(1065,1575) 1085,1595 v1(1330,1595)
PA14: R16.1 U1.76 | length 1265.7
  Top Layer w10: R16.1 975,1675 v1(1040,1740) ; U1.76 v1(1971.1,1705)
  Bottom Layer w10: v1(1040,1740) 1936.1,1740 v1(1971.1,1705)
PB0: R33.1 U1.35 | length 594.8
  Top Layer w10: R33.1 1440,532.48 1675.83,768.31 U1.35
PB1: R31.1 U1.36 | length 561.5
  Top Layer w10: R31.1 1540,532.48 1695.51,687.99 U1.36
PB2: R29.1 U1.37 | length 528.3
  Top Layer w10: R29.1 1640,532.48 1715,607.48 1715,1028.43 U1.37
PB12: R59.1 U1.51 | length 962.1
  Top Layer w10: U1.51 2040.91,1096.61 2063.39,1096.61 2160,1000 2160,868.5 2615.87,412.64 2615.87,411.65 2632.52,395 R59.1
PB13: R58.1 U1.52 | length 888.5
  Top Layer w10: U1.52 2040.91,1116.3 2074.91,1116.3 2205,986.21 2205,922.52 2632.52,495 R58.1
PB14: R56.1 U1.53 | length 818
  Top Layer w10: U1.53 2090.63,1136.89 2632.52,595 R56.1
PB15: R54.1 U1.54 | length 784.7
  Top Layer w10: U1.54 2170.94,1156.57 2632.52,695 R54.1
PC4: R37.1 U1.33 | length 680.4
  Top Layer w10: R37.1 1240,532.48 1256.65,549.13 1257.64,549.13 1412.52,704.02 1444.02,704.02 1636.46,896.46 U1.33
PC5: R35.1 U1.34 | length 628.1
  Top Layer w10: R35.1 1340,532.48 1656.14,848.62 U1.34
PC6: R30.1 U1.63 | length 701.7
  Top Layer w10: U1.63 2371.26,1333.74 2632.52,1595 R30.1
PC7: R28.1 U1.64 | length 735
  Top Layer w10: U1.64 2290.94,1353.43 2632.52,1695 R28.1
PC8: R26.1 U1.65 | length 768.3
  Top Layer w10: U1.65 2210.63,1373.11 2632.52,1795 R26.1
PC9: R24.1 U1.66 | length 819.1
  Top Layer w10: U1.66 2161.37,1392.8 2632.78,1864.2 2632.78,1894.28 R24.1
PD8: R50.1 U1.55 | length 751.4
  Top Layer w10: U1.55 2251.26,1176.26 2632.52,795 R50.1
PD9: R47.1 U1.56 | length 718.2
  Top Layer w10: U1.56 2331.57,1195.94 2632.52,895 R47.1
PD10: R44.1 U1.57 | length 684.9
  Top Layer w10: U1.57 2411.89,1215.63 2632.52,995 R44.1
PD11: R41.1 U1.58 | length 651.6
  Top Layer w10: U1.58 2492.2,1235.32 2632.52,1095 R41.1
PD12: R38.1 U1.59 | length 618.9
  Top Layer w10: U1.59 2573.5,1255 2615.87,1212.64 2615.87,1211.65 2632.52,1195 R38.1
PD13: R36.1 U1.60 | length 601.9
  Top Layer w10: U1.60 2612.2,1274.69 2632.52,1295 R36.1
PD14: R34.1 U1.61 | length 635.2
  Top Layer w10: U1.61 2531.89,1294.37 2632.52,1395 R34.1
PD15: R32.1 U1.62 | length 668.5
  Top Layer w10: U1.62 2451.57,1314.06 2632.52,1495 R32.1
PE7: R27.1 U1.38 | length 497.2
  Top Layer w10: U1.38 1734.88,531.61 R27.1
PE9: R25.1 U1.40 | length 524.4
  Top Layer w10: U1.40 1774.25,598.23 1840,532.48 R25.1
PE11: R23.1 U1.42 | length 549.5
  Top Layer w10: U1.42 1813.62,661.38 1815,660 1815,657.48 1940,532.48 R23.1
PE12: R21.1 U1.43 | length 582.7
  Top Layer w10: U1.43 1833.31,739.17 2040,532.48 R21.1
PE13: R18.1 U1.44 | length 616.6
  Top Layer w10: U1.44 1852.99,818.5 2122.36,549.13 2123.35,549.13 2140,532.48 R18.1
SCL1: P5.3 R2.2 R7.1 | length 543.5
  Top Layer w10: R2.2 R7.1 P5.3
SCL2: P4.2 R11.1 R42.1 | length 725.5
  Top Layer w10: R42.1 1912.05,835.47 2097.52,650 R11.1 2099.49,650 2240,509.49 P4.2
SDA1: P5.2 R6.1 R14.2 | length 543.5
  Top Layer w10: R14.2 R6.1 P5.2
SDA2: P4.1 R10.1 R45.1 | length 740.7
  Top Layer w10: R45.1 2005,790 2050,745 2165,745 2228.5,681.5 R10.1 ; R10.1@2246.14,633.35 2246.14,632.36 2340,538.5 P4.1
pads on no net: U1.1 U1.2 U1.3 U1.4 U1.5 U1.7 U1.8 U1.9 U1.15 U1.16 U1.17 U1.18 U1.39 U1.41 U1.45 U1.46 U1.71 U1.73 U1.77 U1.78 U1.79 U1.80 U1.81 U1.82 U1.83 U1.84 U1.85 U1.86 U1.91 U1.95 U1.96 U1.97 U1.98 X1.1

## Polygon pours and split planes (outlines as drawn)
GND on Top Layer "GND_L01_P006" (solid, remove dead copper, pour order 6): 353.47,341.46 349.9,2339.9 cw(c551.85,2339.9) 551.85,2541.85 550,2541.85 2903.84,2541.85 cw(c2903.84,2347.41) 3098.28,2347.41 3098.28,343.28 3096.85,341.85 cw(c2900,341.85) 2900,145 2900,144.61 550.32,144.61 cw(c550.32,341.46)
3.3V on Top Layer "3.3V_L01_P000" (solid, pour order 0): 675,2155 675,2095 1130,1640 1130,1520 1205,1445 1385,1445 1405,1465 1410,1460 1455,1460 1455,1480 1370,1480 1350,1500 1217.5,1500 1214.15,1767.62 805.49,2155
3.3V on Top Layer "3.3V_L01_P003" (solid, pour order 3): 1420,1735 1420,1675 1430,1675 1490,1615 1510,1615 1510,1665 1440,1735
3.3V on Top Layer "3.3V_L01_P002" (solid, pour order 2): 1200,1735 1440,1735 1440,1675 1200,1675 1200,1730
GND on Bottom Layer "GND_L02_P008" (solid, pour order 8): 353.47,341.46 349.9,2339.9 cw(c551.85,2339.9) 551.85,2541.85 550,2541.85 2903.84,2541.85 cw(c2903.84,2347.41) 3098.28,2347.41 3098.28,343.28 3096.85,341.85 cw(c2900,341.85) 2900,145 2900,144.61 550.32,144.61 cw(c550.32,341.46)
3.3V on Bottom Layer "3.3V_L02_P001" (solid, pour order 1): 1375,1730 1375,1675 1380,1675 1480,1575 1480,1090 1990,1090 1990,1120 1515,1120 1505,1130 1505,1665 1440,1730

## Silkscreen, mask and mechanical layers (free items; w line width, h text height)
Top Overlay:
  text "STM32F100 Dev Board" at 592,2457 h30
  text "BOOT0" at 1357,2377 h30
  text "PB4" at 1707,2377 h30
  text "PB3" at 1807,2377 h30
  text "PD7" at 1907,2377 h30
  text "PD6" at 2012,2377 h30
  text "GND" at 777,2293 h30 r270
  text "PA11" at 2972.02,2277.75 h30
  text "SCL1/PB6" at 1658,2187 h30 r90
  text "SDA1/PB7" at 1558,2182 h30 r90
  text "PA10" at 2972.02,2177.75 h30
  text "3.3V" at 772,2173 h30 r270
  text "PA9" at 2972.02,2077.75 h30
  text "PA8" at 2972.02,1977.75 h30
  text "PC9" at 2972.02,1877.75 h30
  text "GND" at 402.02,1862.75 h30
  text "PC8" at 2972.02,1782.75 h30
  text "NRST" at 402.02,1757.75 h30
  text "SWCLK" at 387,1687 h30
  text "PC7" at 2972.02,1682.75 h30
  text "PA14" at 397,1642 h30
  text "PC6" at 2972.02,1582.75 h30
  text "SWDIO" at 387,1582 h30
  text "PA13" at 397,1532 h30
  text "PD15" at 2972.02,1482.75 h30
  text "PD14" at 2972.02,1382.75 h30
  text "PD13" at 2972.02,1282.75 h30
  text "PD12" at 2972.02,1177.75 h30
  text "PD11" at 2972.02,1077.75 h30
  text "PA0" at 392.02,1042.75 h30
  text "PD10" at 2972,977 h30
  text "PA1" at 397.02,942.75 h30
  text "PD9" at 2967.02,877.75 h30
  text "PA2" at 392.02,832.75 h30
  text "PD8" at 2967.02,782.75 h30
  text "PB15" at 2967.02,677.75 h30
  text "PB14" at 2967.02,577.75 h30
  text "PB13" at 2967.02,477.75 h30
  text "PB12" at 2967,372 h30
  text "PE12" at 1992.02,362.75 h30
  text "PB2" at 1602.02,357.75 h30
  text "SCL2/PB10" at 2192.02,357.75 h30
  text "PA4" at 802,357 h30
  text "PA6" at 997,357 h30
  text "PC4" at 1202,357 h30
  text "PB0" at 1402,357 h30
  text "PE9" at 1802,357 h30
  text "PA3" at 696.71,177.75 h30
  text "PE13" at 2097.02,177.75 h30
  text "PA5" at 897,177 h30
  text "PA7" at 1097,177 h30
  text "PC5" at 1302,177 h30
  text "PB1" at 1512,177 h30
  text "PE7" at 1702,177 h30
  text "PE11" at 1902,177 h30
  text "SDA2/PB11" at 2292,177 h30
Mechanical 1:
  lines w10: 550,144.61 2900,144.61 ; 550,2541.85 2903.84,2541.85 cw(c2903.84,2347.41) 3098.28,2347.41 3098.28,343.28 ; 550.32,144.61 cw(c550.32,341.46) 353.47,341.46 349.9,2339.9 cw(c551.85,2339.9) 551.85,2541.85 ; 2900,145 ccw(c2900,341.85) 3096.85,341.85